# EAGLE board BleShield (EAGLE 6.2)
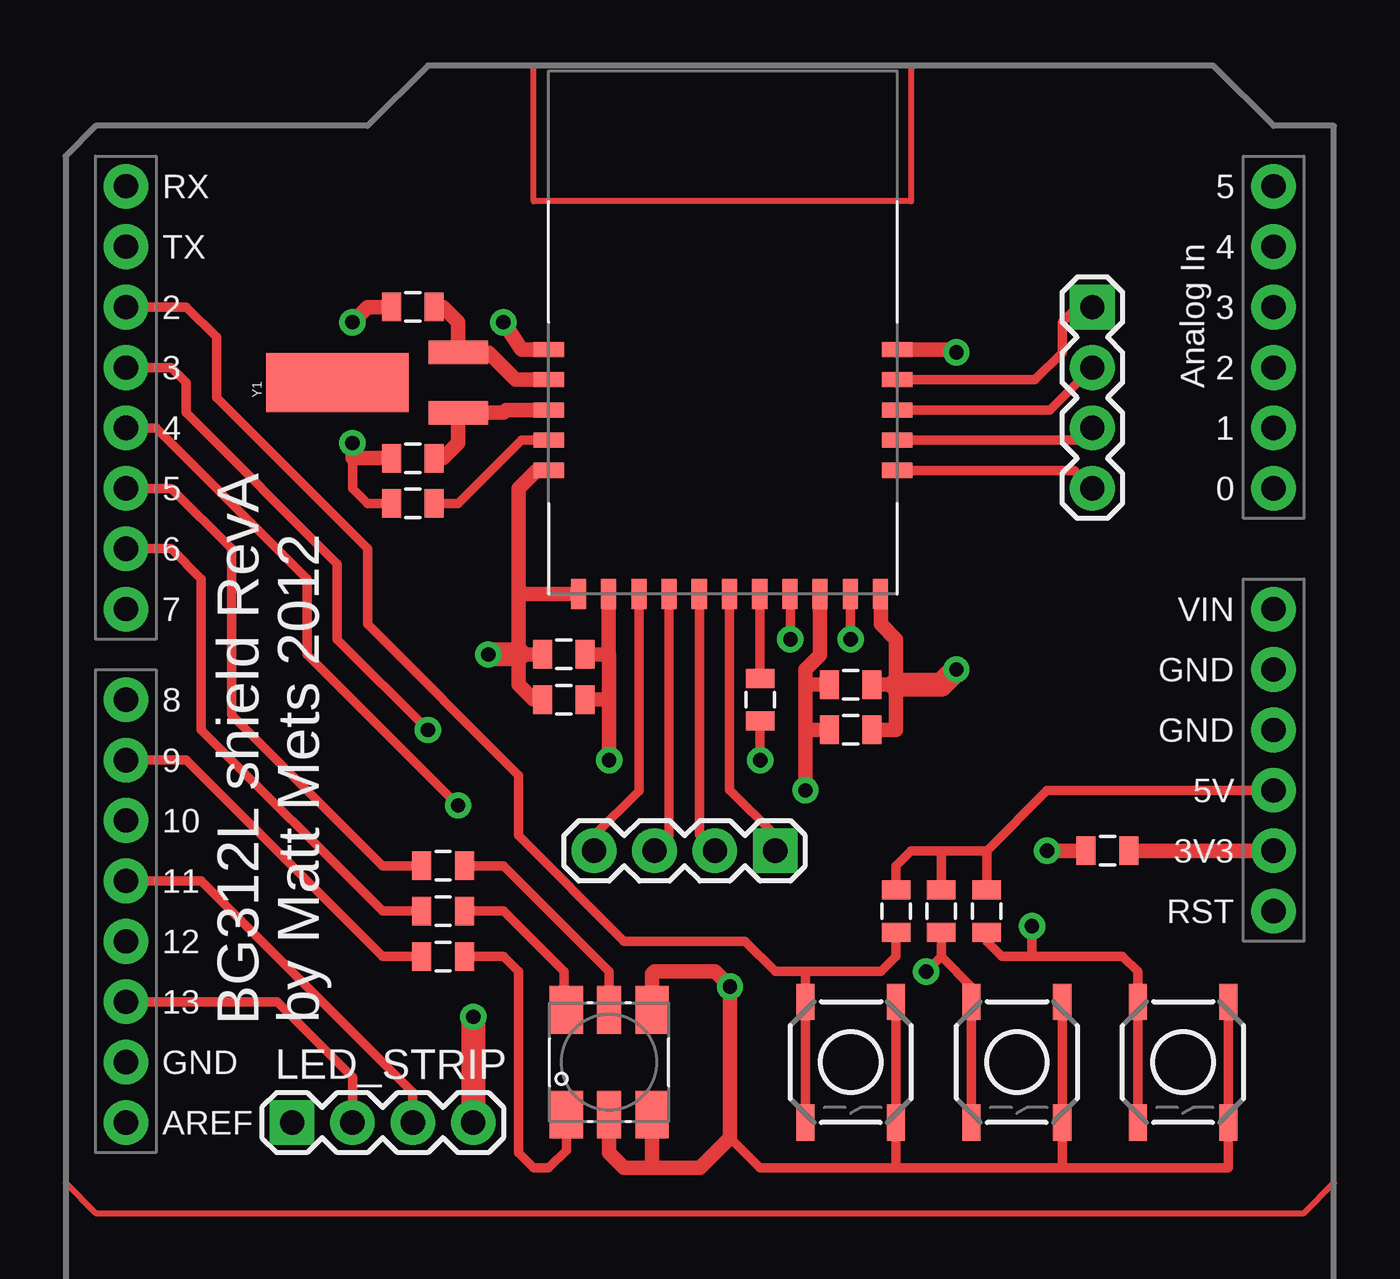
[diagram p0: board, top side]
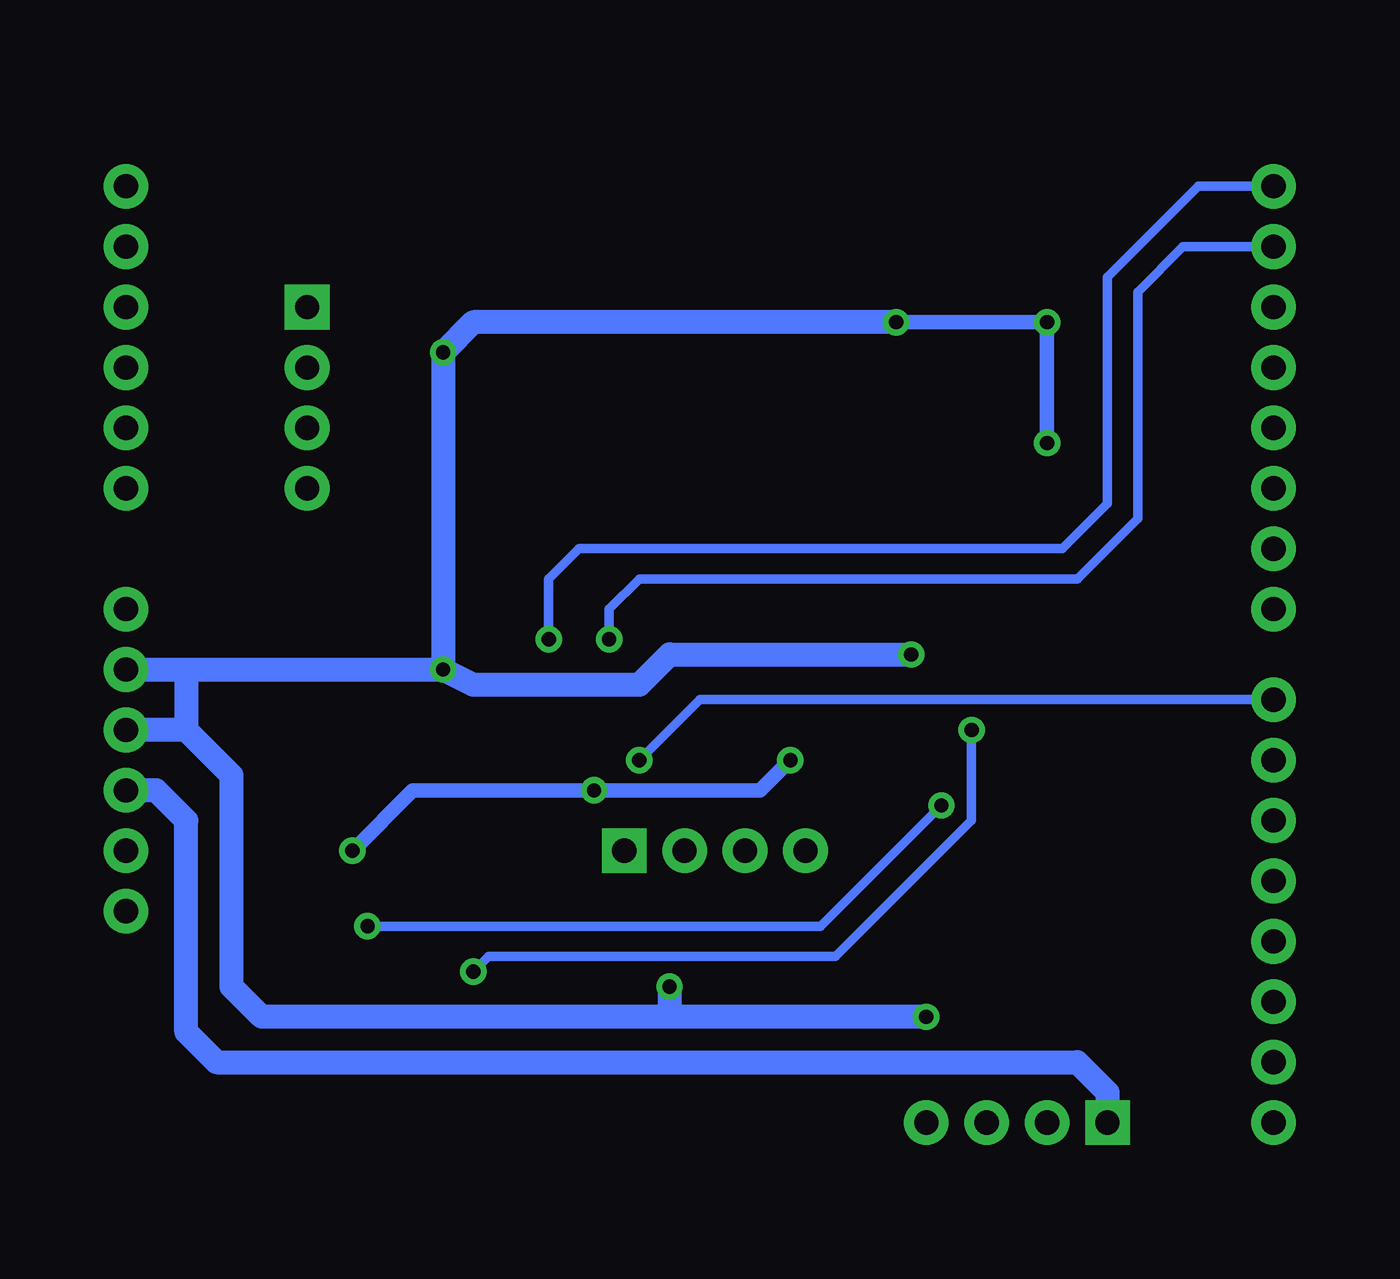
[diagram p1: board, bottom side, seen from below]

No outline drawn. Coordinates in mm, seen from the top.
Copper layers (1*16): Top 0.035mm / dielectric 1.5mm / Bottom 0.035mm
Design rules: minimum track width 8mil, minimum drill 20mil, track to track 8mil, track to pad 8mil, pad to pad 8mil, via to via 8mil, smd to smd 8mil, copper to edge 10mil, drill to drill 8mil, minimum pad ring 12mil, minimum via ring 10mil, stop-mask expansion 4mil, vias tented up to drill 25mil, thermal gap 10mil

## Footprints (pad centres in the part's own frame; a part is rotated, then mirrored left to right if it is on the bottom)
0805 = smd 0.8 x 1.2: 1 -0.9,0; 2 0.9,0
1X04 = drill 1.016 pad 1.88 square: 1 0,0 | drill 1.016 pad 1.88: 2 2.54,0; 3 5.08,0; 4 7.62,0
LED-TRICOLOR-5050 = smd 2 x 1.4: 1 2.2,1.8; 2 -2.2,1.8; 5 2.2,-1.8; 6 -2.2,-1.8 | smd 2 x 1: 3 2.2,0; 4 -2.2,0
TACTILE_SWITCH_SMD = smd 1.524 x 0.762: 1 -2.54,1.905; 2 2.54,1.905; 3 -2.54,-1.905; 4 2.54,-1.905
DUEMILANOVE_SHIELD_NOHOLES = drill 1.016 pad 1.88: 3.3V 50.8,26.67; 5V 50.8,29.21; A0 50.8,41.91; A1 50.8,44.45; A2 50.8,46.99; A3 50.8,49.53; A4 50.8,52.07; A5 50.8,54.61; AREF 2.54,15.24; D2 2.54,49.53; D3 2.54,46.99; D4 2.54,44.45; D5 2.54,41.91; D6 2.54,39.37; D7 2.54,36.83; D8 2.54,33.02; D9 2.54,30.48; D10 2.54,27.94; D11 2.54,25.4; D12 2.54,22.86; D13 2.54,20.32; GND@0 50.8,31.75; GND@1 50.8,34.29; GND@2 2.54,17.78; RES 50.8,24.13; RX 2.54,54.61; TX 2.54,52.07; VIN 50.8,36.83
BG312L = smd 1.27 x 0.635: GND_1 0,10.28; GND_2 0,5.2; GND_5 14.65,10.28; P0_4 14.65,9.01; P0_5 14.65,7.74; P0_6 14.65,6.47; P0_7 14.65,5.2; P2_0 0,6.47; X_OSC1 0,9.01; X_OSC2 0,7.74 | smd 0.635 x 1.27: GND_3 1.25,0; GND_4 13.95,0; P1_4/CT 6.33,0; P1_5/RT 7.6,0; P1_6/TX 10.14,0; P1_7/RX 12.68,0; P2_1 5.06,0; P2_2 3.79,0; RESET 8.87,0; VDD_1 2.52,0; VDD_2 11.41,0
CRYSTAL-32KHZ-SMD = smd 2.5 x 6: SHEILD 0,5.08 | smd 1 x 2.5: X1 -1.27,0; X2 1.27,0

## Placement (x,y rotation side)
C1  15pf  [0805]  14.61,49.53 0 top
C2  15pf  [0805]  14.61,43.18 0 top
C3  10uf  [0805]  33.02,33.66 180 top
C4  10uf  [0805]  20.95,34.92 0 top
C5  100nf  [0805]  33.02,31.75 180 top
C6  100nf  [0805]  20.95,33.02 0 top
JP1  [1X04]  43.18,49.53 270 top
JP2  [1X04]  29.84,26.67 180 top
LED4  LED-TRICOLOR-5050  [LED-TRICOLOR-5050]  22.86,17.78 90 top
LED_STRIP  [1X04]  9.53,15.24 0 top
R1  10K  [0805]  29.21,33.02 90 top
R2  1K  [0805]  14.61,41.27 180 top
R3  330  [0805]  15.88,22.23 0 top
R4  330  [0805]  15.88,24.13 0 top
R5  330  [0805]  15.88,26.04 0 top
R6  0  [0805]  43.81,26.67 180 top
R7  10K  [0805]  34.92,24.13 90 top
R8  10K  [0805]  36.83,24.13 90 top
R9  10K  [0805]  38.73,24.13 90 top
S1  [TACTILE_SWITCH_SMD]  33.02,17.78 270 top
S2  [TACTILE_SWITCH_SMD]  40.01,17.78 270 top
S3  [TACTILE_SWITCH_SMD]  46.99,17.78 270 top
U1  ARDUINO_SHIELDNOHOLES  [DUEMILANOVE_SHIELD_NOHOLES]  0,0 0 top
U$1  BG213L  [BG312L]  20.32,37.47 0 top
Y1  32.768KHz, 10PPM  [CRYSTAL-32KHZ-SMD]  16.51,46.35 90 top

## Library data of the parts
C1-C6 JP1 JP2 LED4 LED_STRIP R1-R9 S1-S3 U1 Y1 = SparkFun
U$1 = BLE

## Nets
3.3V: R6.1 U1.3.3V
5V: LED_STRIP.1 R7.2 R8.2 R9.2 U1.5V
GND: C1.1 C2.1 C3.1 C4.1 C5.1 C6.1 LED4.4 LED4.5 LED4.6 LED_STRIP.4 R2.2 S1.1 S1.2 S2.1 S2.2 S3.1 S3.2 U1.GND@0 U1.GND@1 U$1.GND_1 U$1.GND_2 U$1.GND_3 U$1.GND_4 U$1.GND_5
LED_GREEN: R4.1 U1.D6
LED_RED: R3.1 U1.D9
MOSI: LED_STRIP.3 U1.D11
N$1: R1.2 U$1.RESET
N$2: R2.1 U$1.P2_0
N$3: C1.2 U$1.X_OSC1 Y1.X2
N$4: C2.2 U$1.X_OSC2 Y1.X1
N$5: LED4.2 R3.2
N$6: LED4.1 R4.2
N$7: LED4.3 R5.2
N$8: C3.2 C4.2 C5.2 C6.2 R6.2 U$1.VDD_1 U$1.VDD_2
N$9: JP1.1 U$1.P0_4
N$10: JP1.2 U$1.P0_5
N$11: JP1.3 U$1.P0_6
N$12: JP1.4 U$1.P0_7
N$13: JP2.1 U$1.P1_5/RT
N$14: JP2.2 U$1.P1_4/CT
N$15: JP2.3 U$1.P2_1
N$16: JP2.4 U$1.P2_2
PROP: R5.1 U1.D5
RESET: R1.1 U1.D8
RX: U1.RX U$1.P1_7/RX
SCK: LED_STRIP.2 U1.D13
SWITCH_A: R7.1 S1.3 S1.4 U1.D2
SWITCH_B: R8.1 S2.3 S2.4 U1.D3
SWITCH_C: R9.1 S3.3 S3.4 U1.D4
TX: U1.TX U$1.P1_6/TX

## Tracks (layer width: path | path; a pad name or v marks a point on that pad's centre or on a via)
3.3V
  Top 0.61: U1.3.3V R6.1
5V
  Top 0.406: R7.2 34.92,26.04 35.56,26.67 36.83,26.67 | 36.83,26.67 R8.2 | R9.2 38.73,26.67 | 38.73,26.67 36.83,26.67 | 38.73,26.67 41.27,29.21 U1.5V
  Bottom 1.016: U1.5V 49.53,29.21 48.26,27.94 48.26,19.05 46.99,17.78 10.79,17.78 9.53,16.51 LED_STRIP.1
GND  (via drill 0.6)
  Top 0.406: S1.2 S1.1 34.92,13.34 | S2.2 S2.1 41.91,13.34 | S3.2 S3.1 48.9,13.34 41.91,13.34 | 34.92,13.34 29.21,13.34 27.94,14.61 | 41.91,13.34 34.92,13.34 | R2.2 12.7,41.27 12.06,41.91 12.06,43.18
  Top 0.61: U$1.GND_3 19.05,37.47 | 19.05,34.92 C4.1 | C6.1 19.68,33.02 19.05,33.66 19.05,34.92 | C3.1 34.92,33.66 | 34.92,33.66 34.92,35.56 34.29,36.2 34.29,37.45 U$1.GND_4 | C5.1 34.92,31.75 34.92,33.66 | U$1.GND_5 37.34,47.74 v37.47,47.62 | U$1.GND_1 19.17,47.74 v18.41,48.9 | LED4.4 22.86,13.97 23.5,13.34 24.77,13.34 | 24.77,13.34 26.67,13.34 27.94,14.61 v27.94,20.95 27.3,21.59 24.77,21.59 24.66,21.48 LED4.5 | LED4.6 24.66,13.44 24.77,13.34 | 19.05,37.47 19.05,34.92 | U$1.GND_2 19.8,42.66 19.05,41.91 19.05,37.47 | v12.06,48.9 12.7,49.53 C1.1 | C2.1 12.06,43.18 v12.06,43.81
  Top 1.016: 19.05,34.92 v17.78,34.92 | 34.92,33.66 36.83,33.66 v37.47,34.29 | v17.14,19.68 LED_STRIP.4
  Bottom 0.61: v18.41,48.9 v12.06,48.9 v12.06,43.81
  Bottom 1.016: v37.47,34.29 v37.47,47.62 36.2,48.9 v18.41,48.9 | v17.14,19.68 27.94,19.68 | 27.94,19.68 45.09,19.68 46.35,20.95 46.35,29.84 48.26,31.75 | 48.26,31.75 U1.GND@0 | v37.47,34.29 36.2,33.66 29.21,33.66 27.94,34.92 v17.78,34.92 | 48.26,34.29 v37.47,34.29 | v27.94,20.95 27.94,19.68 | U1.GND@1 48.26,34.29 | 48.26,34.29 48.26,31.75
LED_GREEN
  Top 0.406: R4.1 13.34,24.13 5.71,31.75 5.71,38.1 4.45,39.37 U1.D6
LED_RED
  Top 0.406: U1.D9 5.08,30.48 13.34,22.23 R3.1
MOSI
  Top 0.406: U1.D11 5.71,25.4 14.61,16.51 LED_STRIP.3
N$1
  Top 0.406: U$1.RESET 29.21,37.47 R1.2
N$2
  Top 0.406: U$1.P2_0 19.17,43.94 16.51,41.27 R2.1
N$3
  Top 0.61: U$1.X_OSC1 18.93,46.48 17.78,47.62 Y1.X2 16.51,48.9 15.88,49.53 C1.2
N$4
  Top 0.61: U$1.X_OSC2 18.54,45.2 18.41,45.09 Y1.X1 16.51,43.81 15.88,43.18 C2.2
N$5
  Top 0.406: LED4.2 21.06,14.07 20.32,13.34 19.68,13.34 19.05,13.97 19.05,21.59 18.41,22.23 R3.2
N$6
  Top 0.406: LED4.1 21.06,20.21 20.95,20.32 20.95,21.59 18.41,24.13 R4.2
N$7
  Top 0.406: R5.2 18.41,26.04 22.86,21.59 LED4.3
N$8  (via drill 0.6)
  Top 0.61: R6.2 v41.27,26.67 | v31.11,29.21 31.11,31.75 | 31.11,31.75 C5.2 | C3.2 31.11,33.66 | 31.11,33.66 31.11,31.75 | U$1.VDD_2 31.73,34.91 31.11,34.29 31.11,33.66 | U$1.VDD_1 22.84,34.95 22.86,34.92 | 22.86,34.92 C4.2 | C6.2 22.86,33.02 | 22.86,33.02 22.86,34.92 | v22.86,30.48 22.86,33.02
  Bottom 0.61: v41.27,26.67 38.73,29.21 v31.11,29.21 24.13,29.21 v22.86,30.48
N$9
  Top 0.406: U$1.P0_4 40.76,46.48 41.91,47.62 41.91,48.9 42.55,49.53 JP1.1
N$10
  Top 0.406: U$1.P0_5 41.4,45.2 JP1.2
N$11
  Top 0.406: U$1.P0_6 42.66,43.94 JP1.3
N$12
  Top 0.406: U$1.P0_7 42.42,42.66 JP1.4
N$13
  Top 0.406: U$1.P1_5/RT 27.92,29.23 29.84,27.3 JP2.1
N$14
  Top 0.406: U$1.P1_4/CT 26.65,27.32 JP2.2
N$15
  Top 0.406: U$1.P2_1 25.38,27.29 JP2.3
N$16
  Top 0.406: U$1.P2_2 24.11,29.19 22.23,27.3 JP2.4
N$17
  Top 0.254: 53.34,12.7 53.34,57.15 50.8,57.15 48.26,59.69 35.56,59.69 35.56,53.98 19.68,53.98 19.68,59.69 15.24,59.69 12.7,57.15 1.27,57.15 0,55.88 0,12.7 1.27,11.43 52.07,11.43 53.34,12.7
PROP
  Top 0.406: U1.D5 4.45,41.91 6.99,39.37 6.99,32.38 13.34,26.04 R5.1
RESET  (via drill 0.6)
  Top 0.406: v29.21,30.48 R1.1
  Bottom 0.406: U1.D8 26.67,33.02 v29.21,30.48
RX  (via drill 0.6)
  Top 0.406: U$1.P1_7/RX 33,36.22 v33.02,35.56
  Bottom 0.406: v33.02,35.56 33.02,38.1 31.75,39.37 11.43,39.37 9.53,41.27 9.53,50.8 5.71,54.61 U1.RX
SCK
  Top 0.406: LED_STRIP.2 12.06,17.14 8.89,20.32 U1.D13
SWITCH_A
  Top 0.406: R7.1 34.92,22.23 34.29,21.59 31.11,21.59 | 31.11,21.59 S1.3 S1.4 | 31.11,21.59 29.84,21.59 28.57,22.86 23.5,22.86 19.05,27.3 19.05,29.84 12.7,36.2 12.7,39.37 6.35,45.72 6.35,48.26 5.08,49.53 U1.D2
SWITCH_B  (via drill 0.6)
  Top 0.406: 36.83,22.23 38.1,20.95 S2.3 S2.4 | U1.D3 4.45,46.99 5.08,46.35 5.08,45.09 11.43,38.73 11.43,35.56 v15.24,31.75 | R8.1 36.83,22.23 | 36.83,22.23 v36.2,21.59
  Bottom 0.406: v15.24,31.75 15.24,27.94 20.95,22.23 35.56,22.23 v36.2,21.59
SWITCH_C  (via drill 0.6)
  Top 0.406: S3.4 S3.3 45.09,21.59 44.45,22.23 40.64,22.23 | 40.64,22.23 39.37,22.23 38.73,22.86 R9.1 | U1.D4 3.81,44.45 10.16,38.1 10.16,34.92 v16.51,28.57 | v40.64,23.5 40.64,22.23
  Bottom 0.406: v16.51,28.57 21.59,23.5 v40.64,23.5
TX  (via drill 0.6)
  Top 0.406: v30.48,35.56 30.48,37.45 U$1.P1_6/TX
  Bottom 0.406: U1.TX 6.35,52.07 8.26,50.16 8.26,40.64 10.79,38.1 29.21,38.1 30.48,36.83 v30.48,35.56

## Text on the board
tNames: BG312L shield RevA | by Matt Mets 2012